# Altium PCB Terminal.PcbDoc
Units mm, origin at the board's own origin, x right, y up, seen from the top; angles counter-clockwise.
Board outline 96.25 x 94.75 mm, 2 copper layers (Top Layer, Bottom Layer); 57 components, 75 nets, 317 pads, 0 vias.
Unrouted connection lines stored in the file: 2.
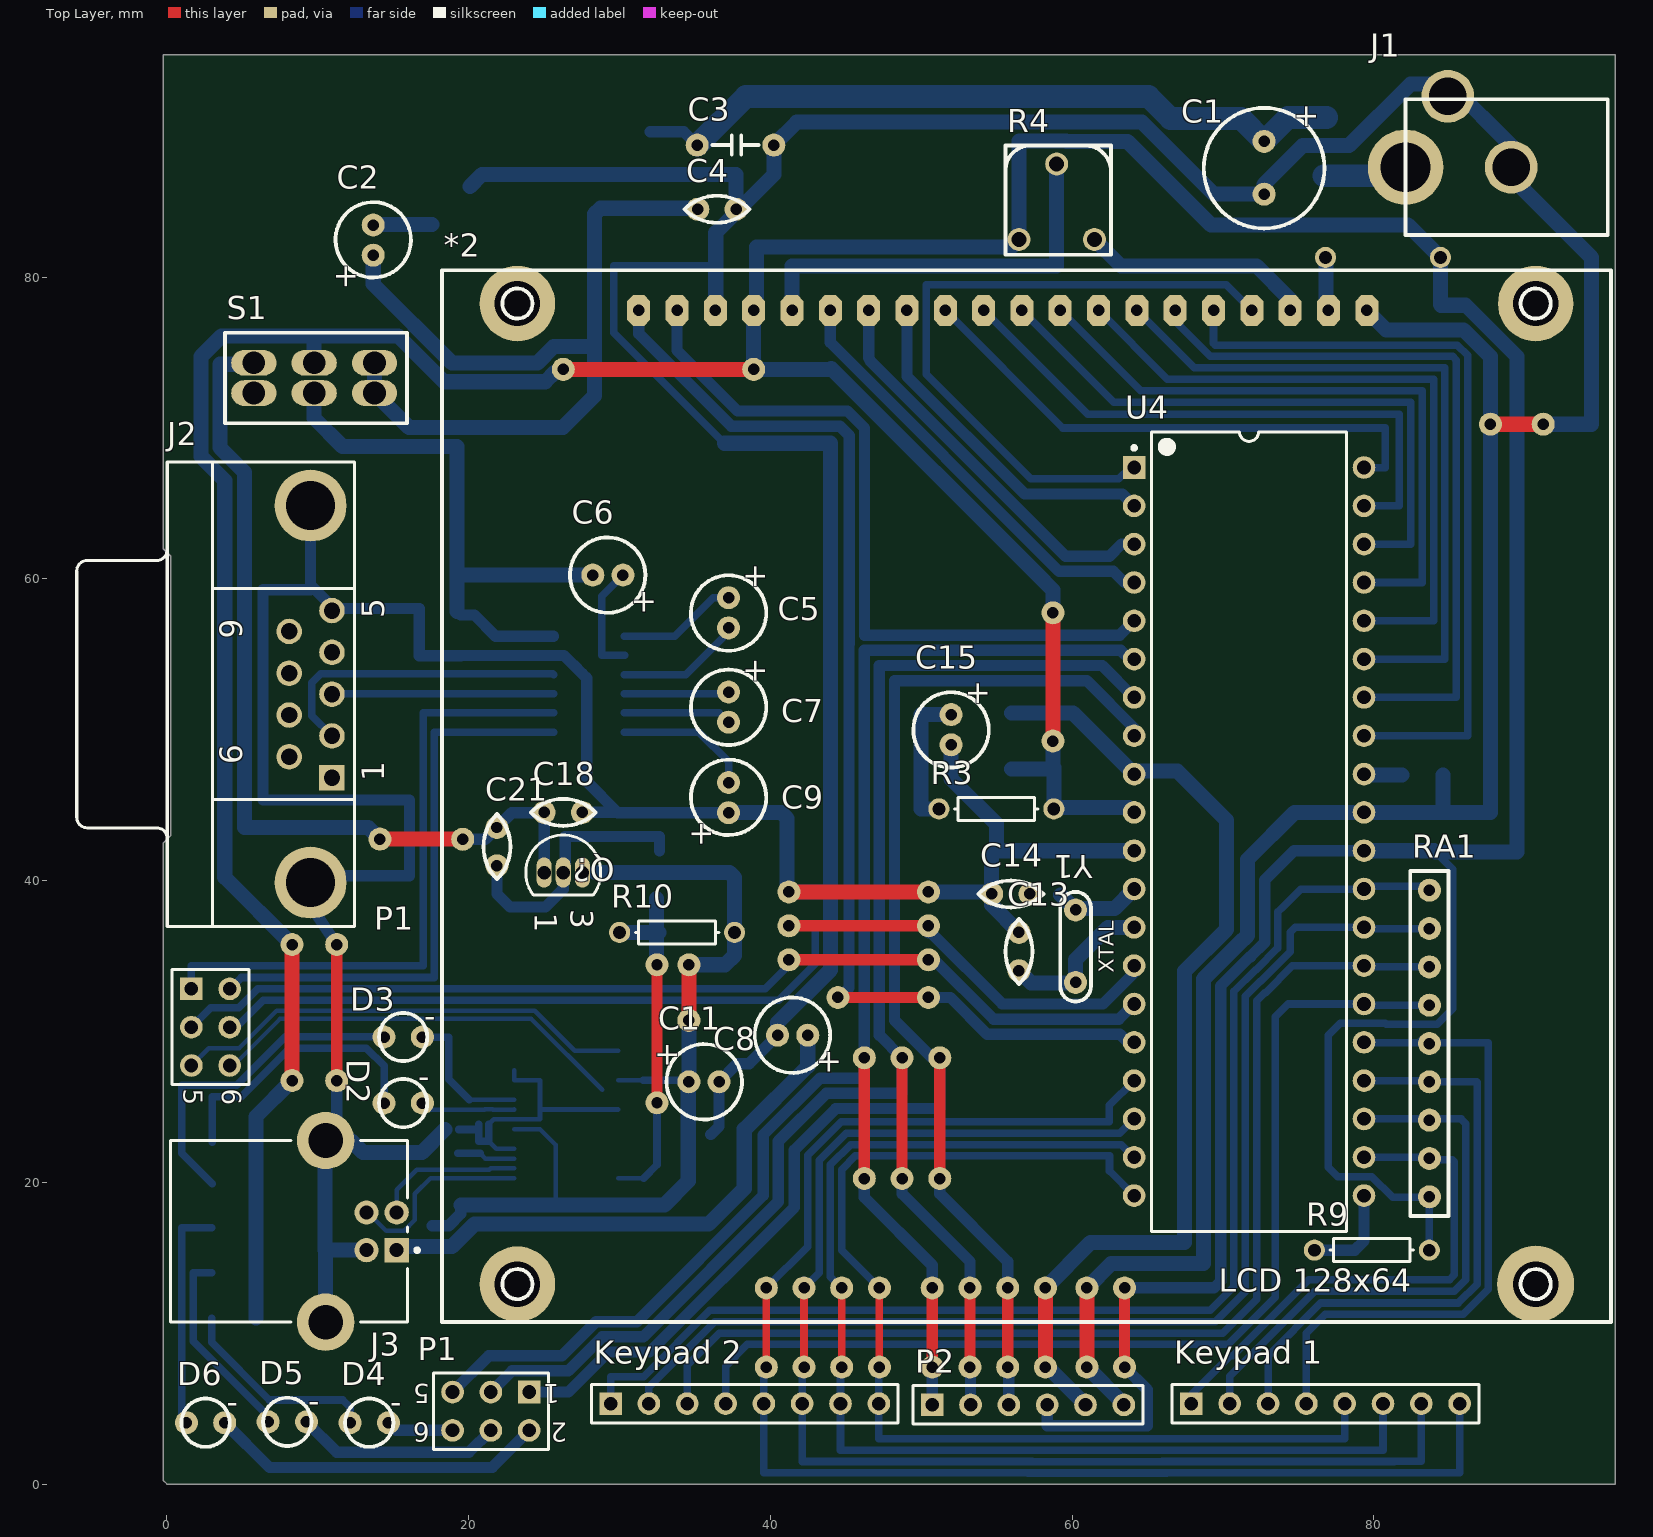
[diagram p0: Top Layer view]
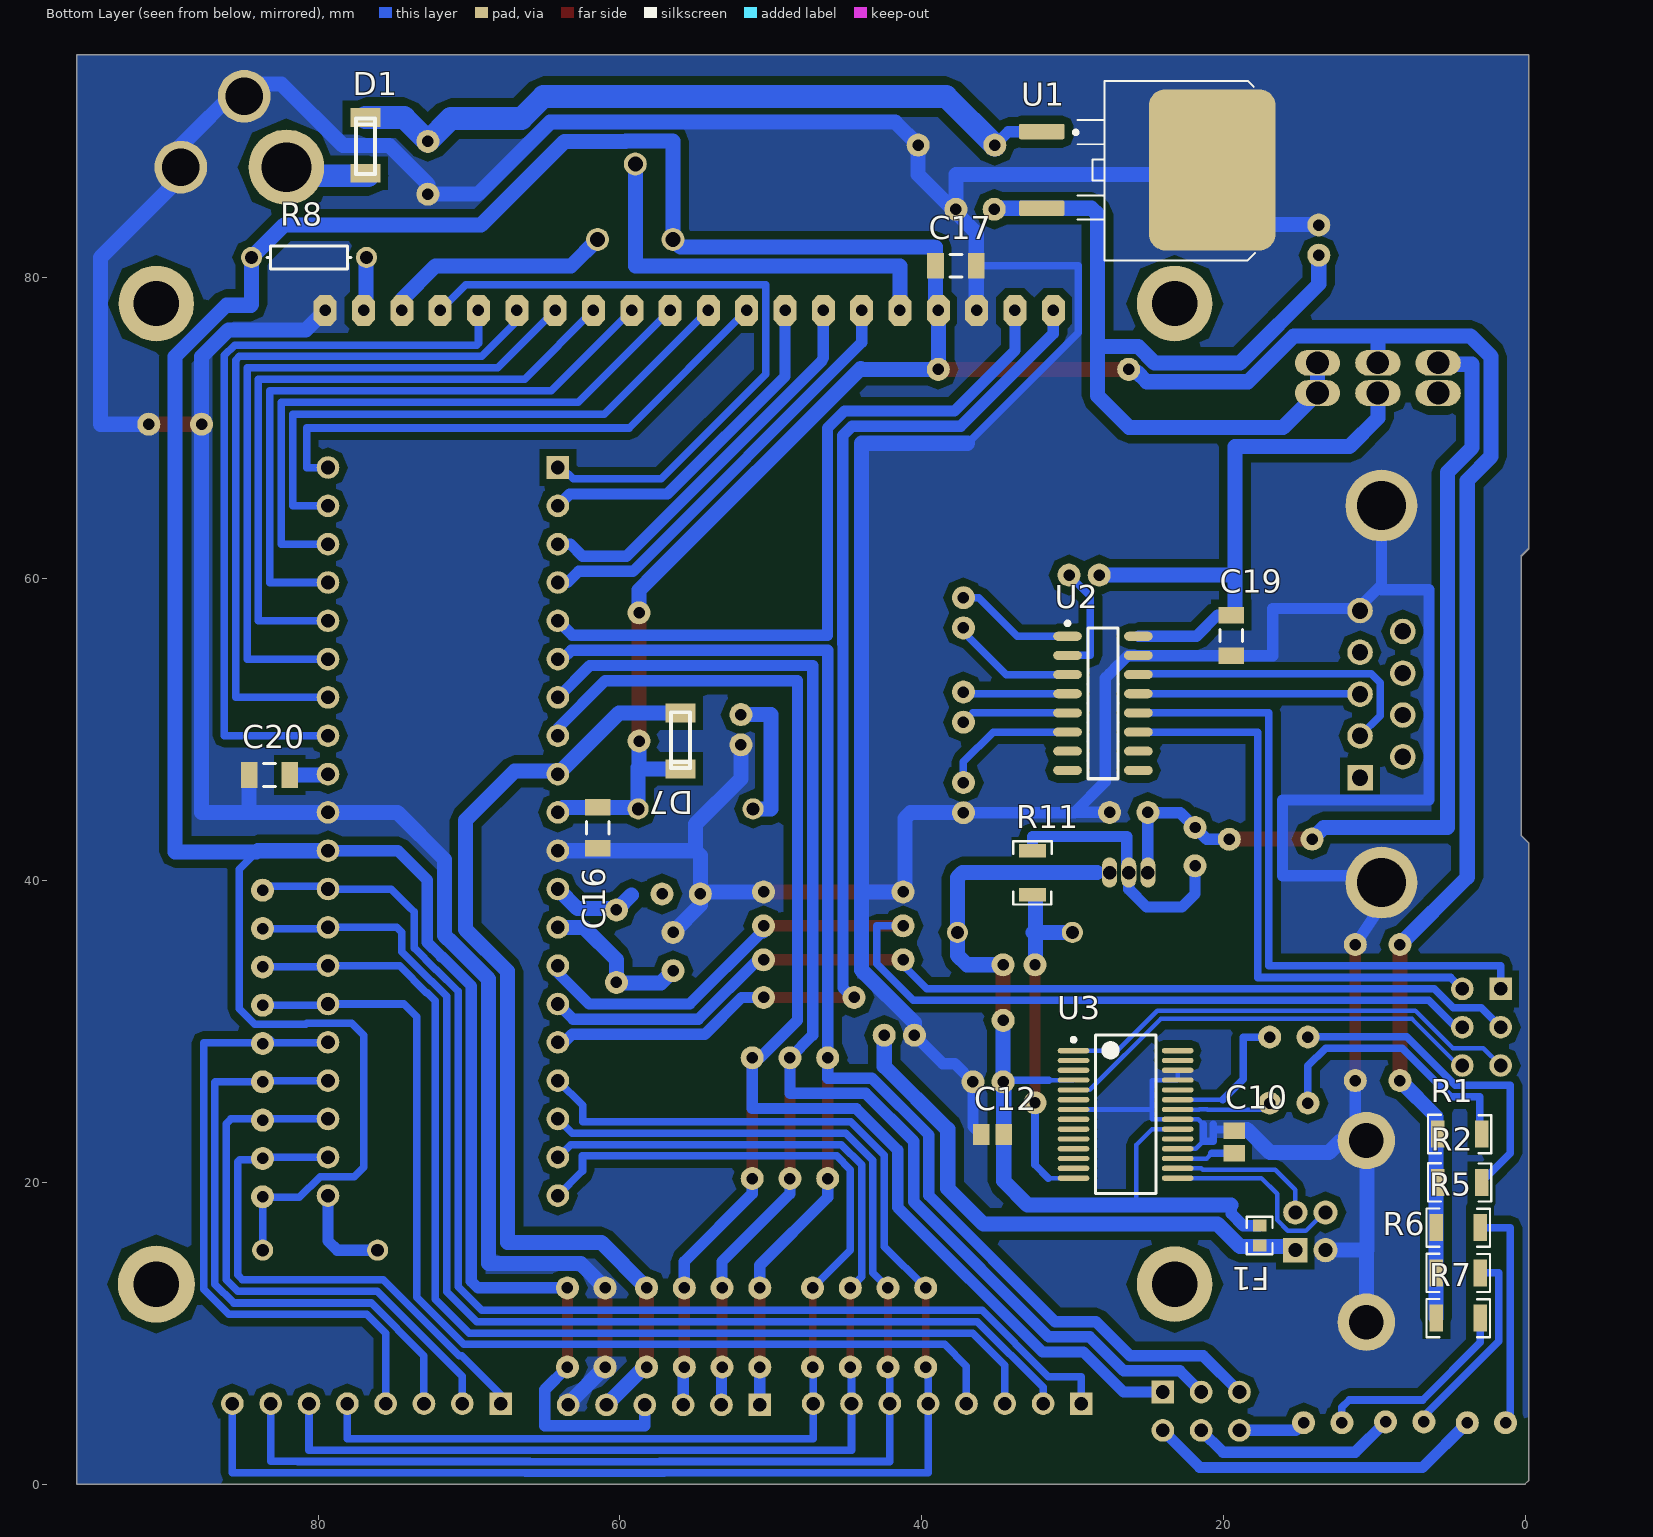
[diagram p1: Bottom Layer view, seen from below]

## Layer stack, top to bottom
Top Solder: solder mask 0.0102, Solder Resist, Dk 3.5
Top Layer: signal copper 0.0356
Dielectric 1: dielectric 0.32, FR-4, Dk 4.8
Bottom Layer: signal copper 0.0356
Bottom Solder: solder mask 0.0102, Solder Resist, Dk 3.5

## Board outline
0,0 -0.25,0.25 -0.25,42.5 0.25,43 0.25,43.25 0.25,61.5 -0.25,62 -0.25,94.75 96,94.75 96,0

## Design rules (kind name [scope] priority, off if disabled: settings)
Clearance Shield_Bottom [InPolygon] p1: gap=0.5
Clearance [All] p2: gap=0.254
PlaneClearance [All] p1: clearance=1
PlaneConnect [All] p1: planeconnectstyle=Relief reliefexpansion=0.508 reliefentries=4 reliefconductorwidth=0.254 reliefairgap=0.7
PolygonConnect Polygon [All vs IsNamedPolygon('Polygon_GND')] p1: connectstyle=Relief reliefconductorwidth=0.254 reliefentries=4 polygonreliefangle="90 Angle" airgapwidth=0
PolygonConnect PolygonConnect_2 [All vs IsNamedPolygon('Polygon_GND')] p2: connectstyle=Relief reliefconductorwidth=0.254 reliefentries=4 polygonreliefangle="90 Angle" airgapwidth=0.5
PolygonConnect PolygonConnect_1 [All] p3: connectstyle=Direct reliefconductorwidth=0.254 reliefentries=4 polygonreliefangle="90 Angle" airgapwidth=0.254
PolygonConnect [All] p4: connectstyle=Relief reliefconductorwidth=0.254 reliefentries=4 polygonreliefangle="45 Angle" airgapwidth=0
RoomDefinition term [InComponentClass('term')] p1: confinementstyle=ConfineIn formatcopy=TRUE lockcomponents=FALSE outline -0.25,94.75 -0.25,62 0.25,61.5 0.25,43 -0.25,42.5 -0.25,0.25 0,0 96,0 96,94.75
RoutingVias [All] p1: holewidth=0.711 width=1.27 viastyle="Through Hole" minholewidth=0.711 minwidth=1.27 maxholewidth=0.711 maxwidth=1.27
SolderMaskExpansion [All] p1: expansion=0.102
Width [All] p1: maxlimit=2 minlimit=0.254 preferedwidth=0.254 minimp=50.000000 maximp=50.000000 favimp=50.000000
28 further rules are at their usual default settings.

## Components (designator, comment, footprint, x,y, rotation, side; value= is the part's Value field where it differs from the comment)
*2 "LCD display" "LCD 128x64" 52.226,75.258 r0 top locked
C1 "CE 470uF 25V Fujicon" "Cap 8x12mm" 72.726,89.008 r270 top
C2 "CE 4.7uF 50V Fujicon" "Cap. el. 5x11mm" 13.671,81.464 r90 top
C3 "CML 330nF 50V P5" "Cap ceramic 4.2x3.8mm" 40.226,88.758 r180 top
C4 "CML 100nF 50V Y5V P2.5" "Cap. ceramic 4.2x3.8mm" 37.726,84.508 r180 top
C5 "CE 1.0uF 50V Fujicon" "Cap. el. 5x11mm" 37.226,58.758 r270 top
C6 "CE 1.0uF 50V Fujicon" "Cap. el. 5x11mm" 30.226,60.258 r180 top
C7 "CE 1.0uF 50V Fujicon" "Cap. el. 5x11mm" 37.226,52.508 r270 top
C8 "CE 1.0uF 50V Fujicon" "Cap. el. 5x11mm" 42.476,29.758 r180 top
C9 "CE 1.0uF 50V Fujicon" "Cap. el. 5x11mm" 37.226,44.508 r90 top
C10 "C0805 100nF 50V Y5V SAMSUNG" C0805 19.272,22.677 r90 bottom
C11 "CE 4.7uF 50V Fujicon" "Cap. el. 5x11mm" 34.594,26.668 r0 top
C12 "C0805 100nF 50V Y5V SAMSUNG" C0805 35.303,23.177 r0 bottom
C13 "CML 22pF 50V NP0" "Cap. ceramic 4.2x3.8mm" 56.476,36.574 r270 top
C14 "CML 22pF 50V NP0" "Cap. ceramic 4.2x3.8mm" 54.666,39.122 r0 top
C15 "CE 1.0uF 50V Fujicon" "Cap. el. 5x11mm" 51.976,51.008 r270 top
C16 "C1206 100nF 50V X7R SAMSUNG" C1206 61.476,43.508 r90 bottom
C17 "C1206 100nF 50V X7R SAMSUNG" C1206 37.726,80.758 r0 bottom
C18 "Cap" "Cap. ceramic 4.2x3.8mm" 24.998,44.528 r0 top
C19 "C1206 100nF 50V X7R SAMSUNG" C1206 19.476,56.258 r90 bottom
C20 "C1206 100nF 50V X7R SAMSUNG" C1206 83.226,47.008 r0 bottom
C21 "Cap" "Cap. ceramic 4.2x3.8mm" 21.872,40.987 r90 top
D1 "TMMBAT48" SOD-80 76.859,88.74 r90 bottom
D2 "L-934LYD" "LED 3mm" 14.388,25.258 r0 top
D3 "L-934LYD" "LED 3mm" 14.388,29.636 r0 top
D4 "HLMP-Q150-F0032" "LED 3mm" 12.137,4.071 r0 top
D5 "HLMP-Q150-F0032" "LED 3mm" 6.705,4.129 r0 top
D6 "HLMP-Q150-F0032" "LED 3mm" 1.288,4.071 r0 top
D7 "TMMBAT48" "SOD-80 A-K" 55.976,49.258 r270 bottom
F1 "Ferrite bead" RES0603R 17.587,16.481 r270 bottom
J1 "PWR2.5" "DC- Power connector" 82.103,87.297 r0 top
J2 "D Connector 9" DSUB1.385-2H9 0.018,52.367 r90 top
J3 "USB CU02SAH1000" 787780 14.226,16.758 r180 top
"Keypad 1" "Header 8" HDR1X8 67.905,5.338 r0 top
"Keypad 2" "Header 8" HDR1X8 29.405,5.338 r0 top
P1 "RS232 chip selector" HDR2X3 1.618,32.829 r270 top
P1 "Prog/Diode selector" HDR2X3 24.008,6.105 r180 top
P2 "Prog. Conn" HDR1X6 50.726,5.258 r0 top
Q? "PMOS-2" TO-92A 26.268,40.54 r270 top
R1 "RES SMD 1206 5% 200ppm 270R 1/4W" RES1206R 4.329,23.208 r0 bottom
R2 "RES SMD 1206 5% 200ppm 270R 1/4W" RES1206R 4.329,20.006 r0 bottom
R3 "RW125CF 10K" AXIAL-0.3 54.976,44.758 r180 top
R4 "PT6v(655MCL)10K" Trimmer 56.476,82.508 r0 top
R5 "R1206 1.8K 5% VISHAY" RES1206R 4.426,17.005 r0 bottom
R6 "R1206 1.8K 5% VISHAY" RES1206R 4.426,14.005 r0 bottom
R7 "R1206 1.8K 5% VISHAY" RES1206R 4.426,11.005 r0 bottom
R8 "R1206 27R 5% YAG/ASJ" AXIAL-0.3 80.605,81.314 r180 bottom
R9 "RW125CF 10K" AXIAL-0.3 79.866,15.508 r0 top
R10 "Res1" AXIAL-0.3 33.811,36.574 r180 top
R11 "Res1" RES1206R 32.645,40.524 r90 bottom
RA1 "RA8A9 10K" RA8A9 94.476,16.508 r90 top
S1 "SW-DPDT" "SWITCH-DPDT - dpl" 5.758,72.325 r0 top
U1 "7805 SMD" D2PAK-3 26.383,87.115 r0 bottom
U2 "MAX232CWE" NSO16_L 27.976,51.758 r180 bottom
U3 "FT232RL-Reel" SSOP-28_N 26.476,24.508 r180 bottom
U4 "ATmega16-16PU" 40P6 71.726,43.258 r0 top
Y1 "Q11.0592 MHz HC-49S" XTAL 60.226,33.258 r90 top

## Footprints (in the part's own frame and the unit in brackets; to place one, negate y for a bottom-side part, rotate by r counter-clockwise, add the part's x,y. Pads: shape width x height; smd on the part's side, far side on the other; paste and mask are expansions set on the pad)
40P6 [mm] "DIP, 40-Leads, Row Spacing 15.24mm, Pitch 2.54mm, Body 52.2x13.95mm"
  rect 1.5x1.5 hole 0.9: 1(-7.62,24.13)
  round 1.5 hole 0.9: 2(-7.62,21.59) 3(-7.62,19.05) 4(-7.62,16.51) 5(-7.62,13.97) 6(-7.62,11.43) 7(-7.62,8.89) 8(-7.62,6.35) 9(-7.62,3.81) 10(-7.62,1.27) 11(-7.62,-1.27) 12(-7.62,-3.81) 13(-7.62,-6.35) 14(-7.62,-8.89) 15(-7.62,-11.43) 16(-7.62,-13.97) 17(-7.62,-16.51) 18(-7.62,-19.05) 19(-7.62,-21.59) 20(-7.62,-24.13) 21(7.62,-24.13) 22(7.62,-21.59) 23(7.62,-19.05) 24(7.62,-16.51) 25(7.62,-13.97) 26(7.62,-11.43) 27(7.62,-8.89) 28(7.62,-6.35) 29(7.62,-3.81) 30(7.62,-1.27) 31(7.62,1.27) 32(7.62,3.81) 33(7.62,6.35) 34(7.62,8.89) 35(7.62,11.43) 36(7.62,13.97) 37(7.62,16.51) 38(7.62,19.05) 39(7.62,21.59) 40(7.62,24.13)
  silkscreen extent -7.74,-26.5 6.45,26.5, body extent -7.05,-26.47 7.05,26.47, height 4.83
787780 [mm] "Connector; USB1.1, Type B, Thru-Hole; 4 Position; Right Angle"
  rect 1.6x1.6 hole 0.92: 1(-1,1.25)
  round 1.6 hole 0.92: 2(-1,-1.25) 3(1,-1.25) 4(1,1.25)
  round 3.8 hole 2.3: 5(3.71,6.02) 6(3.71,-6.02)
  silkscreen extent -2.48,-6.02 13.99,6.02
AXIAL-0.3 [mm] "Axial Device, Thru-Hole; 2 Leads; 0.3 in Pin Spacing"
  round 1.4 hole 0.85: 1(-3.81,0) 2(3.81,0)
  silkscreen extent -2.77,-0.76 2.77,0.76
C0805 [mm] "Chip Capacitor, Body 2.0x1.3mm, IPC High Density"
  rect 1.1x1.4 smd: 1(-0.75,0) 2(0.75,0)
  body extent -1.1,-0.72 1.1,0.72, height 1.4
C1206 [mm] "Chip Capacitor, Body 3.2x1.6mm, IPC High Density"
  rect 1.1x1.7 smd: 1(-1.35,0) 2(1.35,0)
  silkscreen extent -0.4,-0.75 0.4,0.75, body extent -1.7,-0.9 1.7,0.9, height 1.3
"Cap 8x12mm" [mil] "electrolyt.cap. RA, 20%, -40~85°C, 8x12mm RM3.5"
  round 60 hole 30: 1(0,0) 2(137.8,0)
  silkscreen extent -87,-157 227,157
"Cap ceramic 4.2x3.8mm" [mil] "330nF 50V Y5V +80-20% P5"
  round 60 hole 30: 1(0,0) 2(200,0)
  silkscreen extent 40,-25 160,25
"Cap. ceramic 4.2x3.8mm" [mil] "4.2x3.8mm P=2.54mm"
  round 60 hole 30: 1(0,0) 2(100,0)
  silkscreen extent -35,-35 135,35
"Cap. el. 5x11mm" [mil] "electrolyt.cap. RA, 20%, -40~85°C, 5x11mm RM2"
  round 60 hole 30: 1(0,0) 2(78.74,0)
  silkscreen extent -58,-98 138,98
D2PAK-3 [mil] "D-PAK/TO-263-3; 3 Leads (1 Cropped); Body 14.7 (inc. leads) x 10.2 mm (LxW max)"
  round 20 on Mech15: 0(0,0)
  rrect25% 120x40 smd: 1(222.5,-100) 3(222.5,100)
  rrect25% 330x420 smd: 4(-222.5,0)
  silkscreen extent -335,-232 139,236, body extent -361,-197 256,197, height 189
"DC- Power connector" [mm] "YDJ-1140"
  round 5 hole 3.3: 1(0,0)
  round 3.5 hole 2.5: 2(7,0) 3(2.8,4.7)
  silkscreen extent 0,-4.5 13.4,4.5
DSUB1.385-2H9 [mm] "Connector; D Subminiature; 9 Position; Right Angle; Pitch 1.385 mm"
  rect 1.69x1.69 hole 1.09: 1(-5.54,-10.92)
  round 1.69 hole 1.09: 2(-2.77,-10.92) 3(0,-10.92) 4(2.77,-10.92) 5(5.54,-10.92) 6(-4.155,-8.08) 7(-1.385,-8.08) 8(1.385,-8.08) 9(4.155,-8.08)
  round 4.76 hole 3.26: 10(-12.495,-9.5) 11(12.495,-9.5)
  silkscreen extent -15.4,-12.4 15.4,6
HDR1X6 [mm] "Connector; Header; 6 Position"
  rect 1.5x1.5 hole 0.9: 1(0,0)
  round 1.5 hole 0.9: 2(2.54,0) 3(5.08,0) 4(7.62,0) 5(10.16,0) 6(12.7,0)
  silkscreen extent -1.27,-1.27 13.97,1.27
HDR1X8 [mm] "Connector; Header; 8 Position"
  rect 1.5x1.5 hole 0.9: 1(0,0)
  round 1.5 hole 0.9: 2(2.54,0) 3(5.08,0) 4(7.62,0) 5(10.16,0) 6(12.7,0) 7(15.24,0) 8(17.78,0)
  silkscreen extent -1.27,-1.27 19.05,1.27
HDR2X3 [mm] "Connector; Header; 3x2 Position"
  rect 1.5x1.5 hole 0.9: 1(0,0)
  round 1.5 hole 0.9: 2(0,2.54) 3(2.54,0) 4(2.54,2.54) 5(5.08,0) 6(5.08,2.54)
  silkscreen extent -1.27,-1.27 6.35,3.81
"LCD 128x64" [mil]
  oct 60x80 hole 30: 1(-825,100) 2(-725,100) 3(-625,100) 4(-525,100) 5(-425,100) 6(-325,100) 7(-225,100) 8(-125,100) 9(-25,100) 10(75,100) 11(175,100) 12(275,100) 13(375,100) 14(475,100) 15(575,100) 16(675,100) 17(775,100) 18(875,100) 19(975,100) 20(1075,100)
  silkscreen extent -1339,-2540 1713,205
"LED 3mm" [mil] "3mm, 0.7-2mcd@2mA, 588nm Yellow, Diffused, 60°"
  round 60 hole 30: 1(0,0) 2(100,0)
  silkscreen extent -13,-63 113,63
NSO16_L [mm] "SOIC, 16-Leads, Body 9.9x3.9mm, Pitch 1.27mm, IPC High Density"
  oval 1.9x0.6 smd: 1(-2.35,4.445) 2(-2.35,3.175) 3(-2.35,1.905) 4(-2.35,0.635) 5(-2.35,-0.635) 6(-2.35,-1.905) 7(-2.35,-3.175) 8(-2.35,-4.445) 9(2.35,-4.445) 10(2.35,-3.175) 11(2.35,-1.905) 12(2.35,-0.635) 13(2.35,0.635) 14(2.35,1.905) 15(2.35,3.175) 16(2.35,4.445)
  silkscreen extent -2.48,-5 1,5.42, body extent -2,-5 2,5, height 1.75
RA8A9 [mil]
  round 60 hole 30: 1(100,425) 2(200,425) 3(300,425) 4(400,425) 5(500,425) 6(600,425) 7(700,425) 8(800,425) 9(900,425)
  silkscreen extent 50,375 950,475
RES0603R [mm] "resistor 0603 reflow soldering"
  rect 0.8x0.9 smd: 1(-0.65,0) 2(0.65,0)
  silkscreen extent -1.25,-0.85 1.25,0.85, body extent -0.8,-0.4 0.8,0.4, height 0.45
RES1206R [mm] "resistor 1206 reflow soldering"
  rect 0.9x1.8 smd: 1(-1.45,0) 2(1.45,0)
  silkscreen extent -2.1,-1.27 2.1,1.27, body extent -1.5,-0.78 1.6,0.78, height 0.55
SOD-80 [mm]
  rect 1.25x2 smd: 1(-1.85,0) 2(1.85,0)
  silkscreen extent -1.91,-0.64 1.78,0.64
"SOD-80 A-K" [mm]
  rect 1.25x2 smd: A(-1.85,0) K(1.85,0)
  silkscreen extent -1.91,-0.64 1.78,0.64
SSOP-28_N [mm] "SOP, 28-Leads, Body 10.2x5.3mm, Pitch 0.65mm, IPC Medium Density"
  oval 2.1x0.35 smd: 1(-3.45,4.225) 2(-3.45,3.575) 3(-3.45,2.925) 4(-3.45,2.275) 5(-3.45,1.625) 6(-3.45,0.975) 7(-3.45,0.325) 8(-3.45,-0.325) 9(-3.45,-0.975) 10(-3.45,-1.625) 11(-3.45,-2.275) 12(-3.45,-2.925) 13(-3.45,-3.575) 14(-3.45,-4.225) 15(3.45,-4.225) 16(3.45,-3.575) 17(3.45,-2.925) 18(3.45,-2.275) 19(3.45,-1.625) 20(3.45,-0.975) 21(3.45,-0.325) 22(3.45,0.325) 23(3.45,0.975) 24(3.45,1.625) 25(3.45,2.275) 26(3.45,2.925) 27(3.45,3.575) 28(3.45,4.225)
  silkscreen extent -3.57,-5.25 2,5.25, body extent -2.8,-5.25 2.8,5.25, height 2
"SWITCH-DPDT - dpl" [mm] "KELCO"
  oval 3x1.7 hole 1.5: 1(0,0) 2(4,0) 3(8,0) 4(8,2) 5(4,2) 6(0,2)
  silkscreen extent -1.91,-2 10.16,4
TO-92A [mm] "TO, Flat Index; 3 In-Line, Axial Leads; Body Dia. 4.5mm; Leads 0.51 x 0.48 mm (max)"
  oval 2x1 hole 0.9: 1(0,-1.27) 2(0,0) 3(0,1.27)
  silkscreen extent -2.48,-2.48 1.5,2.48
Trimmer [mm] "Carbon Trimmer Potent. 5x5mm 10K, Vertical Type"
  round 1.524 hole 1: 1(0,0) 2(5,0) 3(2.5,5)
  silkscreen extent -0.89,-1.02 6.1,6.22
XTAL [mil]
  round 60 hole 30: 1(0,0) 2(188.98,0)
  silkscreen extent -50,-40 236,40

## Part data
C1: library part "Cap Pol1"
C2 C5 C6 C7 C8 C9 C11: library part "Cap Pol1", "Polarized Capacitor (Radial)"
C3 C4 C13 C14 C16 C17 C19 C20: library part Cap, "Capacitor"
C10 C12: library part "Cap Semi", "Capacitor (Semiconductor SIM Model)"
C15: library part CAPT_1u_0805_10V, "Capacitor SMD Tantalum 1uF 20% 10V 0805"
C18 C21: "Capacitor"
D1: library part "Diode 1N5407", "3 Amp Medium Power Silicon Rectifier Diode"
D2 D3: library part HLMA-PF00-N0031, "Subminiature High Performance AlInGaP Red LED Lamp"
D4 D5 D6: "Subminiature Red LED Lamp"
D7: library part DIODE_1N4148_200mA_SOD523F, "Diode SMD small signal 0.2A SOD-523F"
F1: library part Res2, "Resistor"
J1: "Low Voltage Power Supply Connector"
J2: "Receptacle Assembly, 9 Position, Right Angle"
J3: library part 787834-2, "USB 1.1, Vertical, Thru-Hole, B Type, Receptacle, 4 Position, Natural"
"Keypad 1" "Keypad 2": "Header, 8-Pin"
P1 P1: library part "Header 3X2", "Header, 3-Pin, Dual row"
P2: library part "Header 6", "Header, 6-Pin"
Q?: "P-Channel Power MOSFET"
R1 R2 R3 R5 R6 R7 R8 R9: library part Res1, "Resistor"
R4: library part "Res Tap", "Tapped Resistor"
R10 R11: "Resistor"
RA1: library part Component_1
S1: "Double-Pole, Double-Throw Switch"
U1: library part LM2931AD2T-5.0, "Low Dropout Voltage Regulator"
U2: "+5V Powered RS-232 Driver/Receiver"
U3: "USB UART Asynchronous Serial Data Transfer Chip, SSOP-28, Tape and Reel"
U4: "8-bit AVR Microcontroller, 4.5-5.5V, 16KB Flash, 512 Bytes EEPROM, 1KB SRAM, 40-pin PDIP, Industrial Grade (-40°C to 85°C)"
Y1: library part XTAL, "Crystal Oscillator"

## Free pads (board coordinates)
  round 1.524 hole 0.762: 2(44.726,7.758) 3(47.226,7.758) 4(42.226,7.758) 5(39.726,7.758) 6(47.226,13.008) 7(44.726,13.008) 8(42.226,13.008) 9(39.726,13.008) 13(50.726,13.008) 14(53.226,13.008) 15(55.726,13.008) 16(58.226,13.008) 17(60.976,13.008) 18(63.476,13.008) 19(50.726,7.758) 20(53.226,7.758) 21(55.726,7.758) 22(58.226,7.758) 23(60.976,7.758) 24(63.476,7.758) 25(46.226,20.258) 26(48.726,20.258) 27(51.226,20.258) 28(46.226,28.258) 29(48.725,28.258) 30(51.226,28.258) 31(87.726,70.258) 32(91.226,70.258) 33(38.891,73.895) 34(26.268,73.895) 35(58.726,49.258) 36(58.726,57.758) 37(44.476,32.258) 38(50.476,32.258) 39(50.476,37.008) 40(50.476,34.758) 41(41.226,34.758) 42(41.226,37.008) 50(41.226,39.258) 51(50.476,39.258) 56(11.25,26.748) 57(11.253,35.769) 60(8.289,26.75) 61(8.289,35.769) 62(34.594,30.742) 63(34.597,34.427) 64(32.482,25.277) 65(32.482,34.427) 66(14.115,42.756) 67(19.604,42.747)
  round 5 hole 3: 52(23.226,78.258) 53(90.726,78.258) 55(23.226,13.258)
  round 5.1 hole 3: 54(90.726,13.258)

## Nets (pads, with @x,y where several pads share a name; then routed paths per layer and width w, separated by ;. In a path a pad name is that pad's centre, name@x,y a point inside that pad or via, vN(x,y) a via of type N, cw(c..) or ccw(c..) an arc to the next point about the centre after c; other vN are vias at no path point)
ADAPT-VCC-IN: C2.1 C4.2 S1.3 S1.4 U1.3 | length 56.7
  Bottom Layer w1: C2.1 13.671,79.542 18.887,74.325 24.554,74.325 25.64,75.411 28.302,75.411 28.349,75.458 ; S1.4 S1.3 16.047,70.036 26.239,70.036 28.349,72.145 28.349,75.458 ; C4.2 35.119,84.575 U1.3 28.735,84.575 28.349,84.189 28.349,75.458
CS1: *2.1 pad.37 pad.38 U4.16 | length 76.8
  Top Layer w0.75: pad.37 pad.38
  Bottom Layer w0.75: *2.1@31.271,77.713 *2.1 31.271,76.264 37.41,70.125 44.609,70.125 45.226,69.508 45.226,55.694 45.214,55.682 45.214,32.893 44.68,32.359 pad.37 ; pad.38 51.926,32.258 54.365,29.819 63.165,29.819 63.696,29.288 U4.16
CS2: *2.2 U4.5 | length 49.2
  Bottom Layer w0.75: *2.2 33.811,75.144 37.826,71.129 45.105,71.129 46.23,70.004 46.23,56.27 63.148,56.27 U4.5
FTDI-RXD: P1.6@4.158,27.749 U3.5 | length 27.9
  Bottom Layer w0.3: P1.6@4.158,27.749 4.329,27.919 4.575,27.919 7.492,30.836 24.148,30.836 28.851,26.133
FTDI-TXD: P1.5@1.618,27.749 U3.1 | length 30.9
  Bottom Layer w0.3: P1.5@1.618,27.749 2.772,28.903 4.775,28.903 7.263,31.39 24.377,31.39 27.035,28.733 U3.1
GND: *2.3 *2.20 C1.2 C2.2 C3.1 C4.1 C8.2 C9.1 C10.2 C11.2 C12.2 C13.1 C14.1 C15.2 C16.1 C17.1 C18.2 C19.1 C20.2 J1.2 J1.3 J2.5 J2.10 J2.11 J3.4 J3.5 J3.6 P2.6 pad.17 pad.23 pad.31 pad.32 pad.50 pad.51 pad.56 pad.57 U1.4 U2.15 U3.7 U3.18 U3.21 U3.25 U3.26 U4.11 U4.31 | length 500.3
  Top Layer w0.75: pad.56 pad.57
  Top Layer w1: pad.50 pad.51 ; pad.23 pad.17 ; pad.31 pad.32
  Bottom Layer w0.3: C10.2 C10.2@19.354,23.508 ; 21.33,22.733 21.83,22.233 U3.18 ; 21.33,23.86 21.653,24.183 U3.21 24.726,24.183 24.726,24.833 ; U3.26 U3.25 23.051,26.758 24.726,26.758 24.726,24.833 ; U3.7 24.726,24.833
  Bottom Layer w0.5: C10.2@19.354,23.508 20.655,23.508 ; 20.655,23.858 20.655,23.508 ; 21.33,23.86 21.33,22.733 20.655,22.733 20.655,23.508 ; C17.1 29.603,80.758 29.603,76.336 36.942,68.996
  Bottom Layer w0.75: J2.11 9.518,59.609 ; pad.56 J3.6@11.253,23.515 ; pad.57 8.502,39.872 J2.10 10.495,39.872 10.954,40.331 16.076,40.331 16.076,45.353 6.367,45.353 6.367,59.292 9.518,59.292 9.518,59.609 ; C19.1 16.726,54.908 16.726,58.048 11.079,58.048 9.518,59.609 ; C19.1@19.501,54.933 26.32,54.933 26.954,54.299 26.96,54.293 27.54,53.713 27.833,53.42 27.833,46.564 29.868,44.528 ; C18.2 29.868,44.528 ; C12.2 36.594,23.718 C11.2 37.795,27.869 38.587,27.869 C8.2 ; *2.3 *2.3@36.376,77.823 ; C9.1 29.888,44.508 29.868,44.528
  Bottom Layer w1: J3.6@10.226,22.488 10.476,22.238 10.476,15.508 J3.4 ; J3.5 10.516,15.468 ; J3.6 12.199,22.778 12.991,21.986 16.896,21.986 18.418,23.508 ; C2.2@13.671,83.508 U1.4@17.575,83.508 ; U1.4@20.091,86.024 20.868,86.802 37.726,86.802 C4.1 ; *2.3@36.376,77.823 C17.1 36.376,82.948 40.226,86.798 C3.1 41.746,90.278 64.639,90.278 69.409,85.508 C1.2 72.726,86.162 75.289,88.725 78.35,88.725 82.425,92.799 85.024,92.799 89.224,88.599 89.224,86.51 94.42,81.314 94.42,70.258 pad.32 ; 36.942,68.996 43.976,68.996 43.976,39.258 ; C9.1 40.726,44.508 41.101,44.134 41.101,39.475 pad.50 43.976,39.258 ; C8.2 40.476,30.588 43.976,34.088 43.976,39.258 ; pad.51 54.53,39.258 C14.1 ; C15.2 51.976,46.758 54.976,43.758 54.976,41.988 ; C13.1 54.666,38.384 C14.1 ; pad.23 63.426,5.308 P2.6 ; pad.17 62.592,14.624 68.715,14.624 68.715,33.487 71.326,36.098 71.361,36.098 71.635,36.372 71.635,41.417 74.746,44.528 U4.31 84.576,44.528 ; U4.11 54.976,41.988 ; *2.20 80.821,76.508 85.953,76.508 87.726,74.735 pad.31 87.726,44.508 84.576,44.508 C20.2 ; C14.1 54.666,41.678 54.976,41.988
LCD-VDD: *2.4 C16.2 C17.2 D7.K P2.4 pad.18 pad.24 pad.33 pad.34 pad.35 pad.36 pad.60 pad.61 R1.2 R2.2 R3.1 R4.1 R5.2 R6.2 R7.2 R8.1 R9.2 RA1.1 S1.5 U4.10 U4.30 | length 371.5
  Top Layer w0.75: pad.24 pad.18
  Top Layer w1: pad.60 pad.61 ; pad.34 pad.33 ; pad.35 pad.36
  Bottom Layer w0.5: R9.2 83.681,15.514 RA1.1@83.681,19.008 ; RA1.1 RA1.1@83.681,19.008 ; 83.996,41.988 84.076,41.908 85.226,40.758 85.226,31.503 84.205,30.482 80.82,30.482 80.76,30.542 77.76,30.542 76.98,29.762 76.98,21.008 77.606,20.382 79.866,20.382 81.24,19.008 RA1.1@83.681,19.008
  Bottom Layer w0.75: P2.4 58.346,3.879 64.976,3.879 64.976,6.258 pad.24 ; pad.18 69.409,13.008 69.844,13.444 69.844,33.019 71.794,34.969 71.829,34.969 72.764,35.904 72.764,40.046 74.706,41.988 U4.30
  Bottom Layer w1: R7.2@5.89,11.019 5.89,19.916 5.89,22.677 5.89,24.351 pad.60 ; pad.61 3.828,40.23 3.828,66.534 2.25,68.113 2.25,74.752 3.608,76.111 15.329,76.111 18.368,73.071 25.073,73.071 25.728,73.726 26.268,73.726 pad.34 ; S1.5 9.758,75.59 ; D7.K 58.576,47.408 58.726,47.558 ; pad.35 58.726,47.558 ; pad.36 58.726,59.258 57.664,60.321 44.03,73.954 43.971,73.895 pad.33 *2.4 39.076,77.983 C17.2 39.076,82.004 51.408,82.004 51.416,82.012 52.454,82.012 52.462,82.004 55.972,82.004 R4.1 56.476,89.008 56.492,89.024 59.604,89.024 59.62,89.008 63.666,89.008 69.21,83.464 82.266,83.464 R8.1 84.415,78.196 84.464,78.147 86.087,78.147 89.476,74.758 89.476,41.908 84.076,41.908 ; U4.10 63.776,44.858 C16.2 58.886,44.858 R3.1 58.786,47.498 58.726,47.558 ; U4.30 83.996,41.988
LCD-VEE: *2.18 R4.2 | length 15.4
  Bottom Layer w1: R4.2 63.226,80.758 72.226,80.758 74.451,78.533 *2.18
LCD-VO: *2.5 R4.3 | length 27.3
  Bottom Layer w1: *2.5 41.431,80.75 58.968,80.75 58.976,80.758 R4.3
LED1: D6.2 P1.2@24.008,3.565 | length 22.4
  Bottom Layer w0.75: D6.2 6.791,1.109 21.551,1.109 P1.2@24.008,3.565
LED2: D5.2 P1.4@21.468,3.565 | length 13.7
  Bottom Layer w0.75: D5.2 11.253,2.121 20.024,2.121 P1.4@21.468,3.565
LED3: D4.2 P1.6@18.928,3.565 | length 4.5
  Bottom Layer w0.75: D4.2 15.183,3.565 P1.6@18.928,3.565
MAX232-VCC: C6.2 C19.2 S1.2 U2.16 | length 38.6
  Bottom Layer w0.75: C19.2 20.376,57.608 21.781,56.203 U2.16
  Bottom Layer w1: S1.2 9.758,70.657 11.633,68.782 19.226,68.782 19.226,60.258 ; C19.2@19.226,57.858 19.226,60.258 ; C6.2 19.226,60.258
MAX-RXD: P1.2@4.158,32.829 U2.11 | length 38.1
  Bottom Layer w0.5: P1.2@4.158,32.829 4.912,33.583 17.73,33.583 17.73,35.754 17.73,49.853 U2.11
MAX-TXD: P1.1@1.618,32.829 U2.12 | length 42.3
  Bottom Layer w0.5: P1.1@1.618,32.829 1.618,34.368 16.976,34.368 16.976,51.123 U2.12
MCU-RXD: P1.4@4.158,30.289 pad.39 pad.42 U4.14 | length 71.2
  Top Layer w0.75: pad.42 pad.39
  Bottom Layer w0.5: P1.4@4.329,30.459 4.754,30.459 6.367,32.072 40.54,32.072 42.972,34.504 42.972,37.008 pad.42
  Bottom Layer w0.75: pad.39 50.476,36.548 50.653,36.548 55.374,31.827 62.045,31.827 64.106,33.888 U4.14
MCU-TXD: P1.3@1.618,30.289 pad.40 pad.41 U4.15 | length 66.7
  Top Layer w0.75: pad.41 pad.40
  Bottom Layer w0.5: P1.3@1.618,30.289 2.904,31.575 4.769,31.575 6.023,32.829 25.783,32.829 39.65,32.829 41.325,34.504 41.226,34.504 pad.41
  Bottom Layer w0.75: pad.40 50.846,34.758 54.781,30.823 63.101,30.823 U4.15
MISO: P1.3@21.468,6.105 P2.2 pad.14 pad.20 pad.26 pad.29 U4.7 | length 109.4
  Top Layer w0.75: pad.29 pad.26 ; pad.20 pad.14
  Bottom Layer w0.75: P1.3@21.468,6.105 22.874,7.511 26.599,7.511 28.849,9.761 31.569,9.761 40.523,18.715 40.523,22.725 43.701,25.903 48.726,25.903 pad.29 47.222,29.761 47.222,54.262 61.972,54.262 61.976,54.258 61.996,54.258 U4.7 ; pad.26 48.726,19.258 53.226,14.758 pad.14 ; pad.20 53.266,7.718 P2.2
MOSI: P1.5@18.928,6.105 P2.1 pad.13 pad.19 pad.25 pad.28 U4.6 | length 109.6
  Top Layer w0.75: pad.25 pad.28 ; pad.19 pad.13
  Bottom Layer w0.75: P1.5@18.928,6.105 21.338,8.515 26.183,8.515 28.433,10.765 31.153,10.765 39.519,19.131 39.519,23.141 43.285,26.907 46.226,26.907 pad.28 46.218,28.266 46.218,55.266 63.218,55.266 63.796,54.688 U4.6 ; pad.25 46.226,19.008 50.726,14.508 pad.13 ; P2.1 pad.19
Net*2_6: *2.6 U4.4 | length 28.8
  Bottom Layer w0.75: *2.6 43.971,75.673 59.14,60.504 62.73,60.504 63.466,59.768 U4.4
Net*2_7: *2.7 U4.3 | length 26.6
  Bottom Layer w0.75: *2.7 46.511,74.643 46.601,74.553 46.601,74.464 59.556,61.508 62.476,61.508 63.276,62.308 U4.3
Net*2_8: *2.8 U4.2 | length 23
  Bottom Layer w0.75: *2.8 49.051,73.433 56.855,65.629 63.325,65.629 U4.2
Net*2_9: *2.9 U4.40 | length 36.4
  Bottom Layer w0.5: *2.9 59.381,70.008 80.76,70.008 80.76,67.388 U4.40
Net*2_10: *2.10 U4.39 | length 38.8
  Bottom Layer w0.5: *2.10 61.021,70.909 81.694,70.909 81.694,64.848 U4.39
Net*2_11: *2.11 U4.38 | length 40.8
  Bottom Layer w0.5: *2.11 62.748,71.721 82.448,71.721 82.448,62.308 U4.38
Net*2_12: *2.12 U4.37 | length 42.8
  Bottom Layer w0.5: *2.12 64.534,72.475 83.202,72.475 83.202,59.768 U4.37
Net*2_13: *2.13 U4.36 | length 44.7
  Bottom Layer w0.5: *2.13 66.307,73.242 83.956,73.242 83.956,57.228 U4.36
Net*2_14: *2.14 U4.35 | length 46.7
  Bottom Layer w0.5: *2.14 68.093,73.996 84.71,73.996 84.71,54.688 U4.35
Net*2_15: *2.15 U4.34 | length 48.9
  Bottom Layer w0.5: *2.15 66.831,77.087 69.168,74.75 85.224,74.75 85.464,74.511 85.464,52.148 U4.34
Net*2_16: *2.16 U4.33 | length 51.4
  Bottom Layer w0.5: *2.16 69.371,75.613 69.48,75.504 85.537,75.504 86.218,74.823 86.218,49.608 U4.33
Net*2_17: *2.17 U4.1 | length 45.2
  Bottom Layer w0.5: U4.1 63.856,67.388 63.101,66.633 57.271,66.633 50.325,73.579 50.325,76.758 50.325,79.504 64.788,79.504 64.792,79.508 70.201,79.508 *2.17
Net*2_19: *2.19 R8.2 | length 3.3
  Bottom Layer w1: R8.2@76.822,81.008 76.822,77.967 *2.19
NetC1_1: C1.1 C3.2 D1.2 U1.1 | length 48.3
  Bottom Layer w0.75: U1.1 34.249,89.655 C3.2
  Bottom Layer w1.5: C3.2 38.37,91.982 65.062,91.982 66.52,90.524 71.21,90.524 C1.1 74.242,90.524 ; 74.308,90.59 D1.2
NetC5_1: C5.1 U2.1 | length 8
  Bottom Layer w0.5: U2.1 33.671,56.203 36.226,58.758 C5.1
NetC5_2: C5.2 U2.3 | length 8.3
  Bottom Layer w0.5: U2.3 34.381,53.663 37.226,56.508 C5.2
NetC6_1: C6.1 U2.2 | length 7.4
  Bottom Layer w0.5: C6.1 28.808,58.84 28.808,54.933 U2.2
NetC7_1: C7.1 U2.4 | length 6.9
  Bottom Layer w0.5: U2.4 C7.1@37.226,52.393
NetC7_2: C7.2 U2.5 | length 6.3
  Bottom Layer w0.5: U2.5 36.611,51.123
NetC8_1: C8.1 F1.2 J3.1 | length 36.4
  Bottom Layer w1: J3.1 15.476,15.758 18.21,15.758 18.214,15.754 18.896,15.754 20.391,17.249 35.907,17.249 38.265,19.607 38.265,23.533 38.315,23.533 42.476,27.695 C8.1@42.476,29.508
NetC9_2: C9.2 U2.6 | length 9.1
  Bottom Layer w0.5: U2.6 35.246,49.853 37.226,47.873 C9.2
NetC10_1: C10.1 U3.17 | length 3.9
  Bottom Layer w0.3: 20.758,21.927 21.102,21.583 U3.17
  Bottom Layer w0.5: C10.1 20.758,21.927
NetC13_2: C13.2 U4.13 Y1.1 | length 10.4
  Bottom Layer w1: C13.2 57.285,33.225 60.193,33.225 Y1.1 60.226,34.758 62.376,36.908 U4.13
NetC14_2: C14.2 U4.12 Y1.2 | length 5.9
  Bottom Layer w1: 59.22,39.064 Y1.2 60.33,38.162 62.82,38.162 U4.12
NetC18_1: C18.1 C21.2 pad.66 pad.67 Q?.1 S1.6 | length 58.5
  Top Layer w1: pad.66 pad.67@19.596,42.756
  Bottom Layer w0.75: pad.67 21.093,42.747 C21.2 22.854,44.508 C18.1@24.978,44.508 ; Q?.1 C18.1
  Bottom Layer w1: S1.6 5.665,74.233 3.504,74.233 3.504,68.708 5.135,67.076 5.135,43.527 13.344,43.527 pad.66
NetC20_1: C20.1 U4.32 | length 2.6
  Bottom Layer w0.5: U4.32@79.346,47.008 U4.32
  Bottom Layer w1: U4.32@79.346,47.008 C20.1
NetC21_1: C21.1 Q?.2 R11.2 | length 17.8
  Bottom Layer w0.75: C21.1 21.872,39.122 22.735,38.259 25.084,38.259 26.268,39.442 Q?.2 26.409,40.681 26.409,42.925 32.645,42.925 R11.2
NetD1_1: D1.1 J1.1 | length 4.2
  Bottom Layer w1.5: D1.1@76.672,86.727 J1.1@80.853,86.727
NetD2_1: D2.1 R1.1 | length 18.7
  Bottom Layer w0.5: R1.1@2.99,22.677 2.99,25.673 4.922,25.673 8.152,28.903 13.213,28.903 14.388,27.728 D2.1
NetD2_2: D2.2 U3.22 | length 6.1
  Bottom Layer w0.3: D2.2@16.928,24.833 16.932,24.829 21.051,24.829 21.059,24.837 21.601,24.837 21.609,24.829 23.022,24.829 U3.22
NetD3_1: D3.1 R2.1 | length 22.1
  Bottom Layer w0.5: R2.1@2.99,19.916 0.976,21.93 0.976,26.427 4.61,26.427 7.84,29.657 14.367,29.657 D3.1
NetD3_2: D3.2 U3.23 | length 9.5
  Bottom Layer w0.3: 20.024,25.483 U3.23
  Bottom Layer w0.5: D3.2 18.679,29.636 18.679,26.828 20.024,25.483
NetD4_1: D4.1 R7.1 | length 13.6
  Bottom Layer w0.5: R7.1 2.976,9.393 6.791,5.578 11.657,5.578 12.137,5.097 D4.1
NetD5_1: D5.1 R6.1 | length 13.1
  Bottom Layer w0.5: R6.1 1.733,14.005 1.73,14.008 1.73,9.484 6.705,4.51 D5.1@6.705,4.258
NetD6_1: D6.1 R5.1 | length 14.9
  Bottom Layer w0.5: D6.1@1.288,4.258 0.976,4.571 0.976,17.008 R5.1@2.973,17.008
NetJ2_2: J2.2 U2.14 | length 20.4
  Bottom Layer w0.5: J2.2 9.589,50.946 9.589,53.126 10.18,53.716 25.573,53.716 U2.14
NetJ2_3: J2.3 U2.13 | length 14.7
  Bottom Layer w0.5: J2.3@10.964,52.393 U2.13
NetJ3_2: J3.2 U3.16 | length 9.9
  Bottom Layer w0.3: J3.2 15.226,19.508 16.555,20.837 21.359,20.837 21.455,20.933 U3.16
NetJ3_3: J3.3 U3.15 | length 12.8
  Bottom Layer w0.3: J3.3 13.318,18.008 14.522,16.804 15.725,16.804 16.43,17.509 16.43,19.244 17.469,20.283 U3.15
"NetKeypad 1_1": "Keypad 1.1" RA1.2 U4.22 | length 34.7
  Bottom Layer w0.5: 67.905,5.338 67.905,5.937 70.472,8.504 70.656,8.504 75.697,13.545 85.013,13.545 85.334,13.866 85.334,21.367 85.192,21.508 RA1.2@83.726,21.508 ; U4.22 RA1.2@83.566,21.668
"NetKeypad 1_2": "Keypad 1.2" RA1.3 U4.23 | length 37.2
  Bottom Layer w0.5: 70.445,5.338 70.445,7.161 76.076,12.791 85.326,12.791 86.088,13.554 86.088,23.896 85.856,24.128 ; U4.23 85.776,24.208
"NetKeypad 1_3": "Keypad 1.3" RA1.4 U4.24 | length 39.9
  Bottom Layer w0.5: 72.985,5.338 72.985,8.517 76.476,12.008 85.609,12.008 86.842,13.241 86.842,26.642 86.816,26.668 RA1.4 ; U4.24 83.716,26.748 RA1.4@83.726,26.758
"NetKeypad 1_4": "Keypad 1.4" RA1.5 U4.25 | length 42.6
  Bottom Layer w0.5: 75.525,5.338 75.525,9.991 76.788,11.254 85.921,11.254 87.596,12.929 87.596,29.258 84.226,29.258 84.026,29.458 83.176,29.458 82.976,29.258 79.716,29.258 U4.25@79.516,29.458
"NetKeypad 1_5": "Keypad 1.5" "Keypad 2.8" pad.3 pad.6 U4.20 | length 73.8
  Top Layer w0.5: pad.3 pad.6
  Bottom Layer w0.5: pad.3 47.185,7.758 47.185,5.338 47.185,3.008 57.974,3.008 57.982,3 65.34,3 65.348,3.008 78.065,3.008 78.065,5.338 ; pad.6 44.73,15.504 44.73,20.85 45.638,21.758 46.79,21.758 50.662,21.758 62.476,21.758 62.476,20.758 U4.20 U4.20@63.856,19.128
"NetKeypad 1_6": "Keypad 1.6" "Keypad 2.7" pad.2 pad.7 U4.19 | length 79.4
  Top Layer w0.5: pad.2 pad.7
  Bottom Layer w0.5: pad.2 44.645,7.758 44.645,5.338 44.645,2.254 57.662,2.254 57.67,2.246 65.653,2.246 65.661,2.254 78.48,2.254 78.48,2.258 80.605,2.258 80.605,5.338 ; pad.7 43.976,13.758 43.976,21.163 45.326,22.512 47.102,22.512 50.35,22.512 62.788,22.512 62.792,22.508 63.266,22.508 U4.19
"NetKeypad 1_7": "Keypad 1.7" "Keypad 2.6" pad.4 pad.8 U4.18 | length 88
  Top Layer w0.5: pad.4 pad.8
  Bottom Layer w0.5: pad.4 42.105,7.758 42.105,5.338 42.105,1.5 57.349,1.5 57.357,1.492 65.965,1.492 65.973,1.5 81.359,1.5 81.359,1.508 83.145,1.508 83.145,5.338 ; pad.8@42.226,13.512 pad.8 43.222,14.004 43.222,21.475 45.013,23.266 47.414,23.266 ; 47.414,23.266 50.038,23.266 ; 50.038,23.266 63.101,23.266 63.105,23.262 63.16,23.262 U4.18 U4.18@64.052,24.262
"NetKeypad 1_8": "Keypad 1.8" "Keypad 2.5" pad.5 pad.9 U4.17 | length 98
  Top Layer w0.5: pad.5 pad.9
  Bottom Layer w0.5: pad.5 39.565,7.758 39.565,5.338 39.565,0.746 57.037,0.746 57.045,0.738 66.277,0.738 66.285,0.746 83.899,0.746 83.899,0.758 85.685,0.758 85.685,5.338 ; pad.9@39.976,13.008 pad.9 42.468,15.75 42.468,21.787 44.701,24.02 47.726,24.02 ; 47.727,24.02 49.726,24.02 ; 49.726,24.02 62.472,24.02 62.472,25.114 U4.17 U4.17@64.106,26.388
"NetKeypad 2_1": "Keypad 2.1" RA1.9 U4.29 | length 82.4
  Bottom Layer w0.5: 29.405,5.338 29.405,7.129 31.6,7.129 35.991,11.52 69.164,11.52 70.723,13.079 70.723,32.655 72.158,34.09 72.193,34.09 73.643,35.54 73.643,37.925 74.024,38.306 74.785,39.067 75.166,39.448 U4.29 79.516,39.618 RA1.9@83.681,39.618
"NetKeypad 2_2": "Keypad 2.2" RA1.8 U4.28 | length 77.8
  Bottom Layer w0.5: 31.945,5.338 31.945,6.408 36.303,10.766 69.476,10.766 71.477,12.767 71.477,32.343 72.47,33.336 72.505,33.336 74.451,35.282 74.451,36.574 74.785,36.908 U4.28 U4.28@79.516,37.078 ; U4.28@79.406,36.828 RA1.8
"NetKeypad 2_3": "Keypad 2.3" RA1.7 U4.27 | length 74.4
  Bottom Layer w0.5: 34.485,5.338 34.485,7.882 36.616,10.012 69.976,10.012 72.231,12.267 72.231,32.03 72.783,32.582 72.818,32.582 74.604,34.368 U4.27 U4.27@79.516,34.538 ; U4.27@79.506,34.288 RA1.7
"NetKeypad 2_4": "Keypad 2.4" RA1.6 U4.26 | length 70.1
  Bottom Layer w0.5: 37.025,5.338 37.025,7.807 38.476,9.258 70.343,9.258 73.478,12.393 73.478,30.994 74.312,31.828 U4.26 ; U4.26@79.236,31.748 RA1.6
NetR9_1: R9.1 U4.21 | length 6.7
  Bottom Layer w0.75: R9.1@75.906,15.508 78.726,15.508 79.346,16.128 U4.21
NetR10_2: pad.64 pad.65 R10.2 R11.1 U3.14 | length 23
  Top Layer w0.75: pad.64 pad.65@32.482,34.423
  Bottom Layer w0.3: U3.14 31.602,20.283
  Bottom Layer w0.5: 31.602,20.283 32.482,21.163 pad.64
  Bottom Layer w1: R10.2 32.619,36.574 ; pad.65@32.44,34.591 R11.1@32.44,38.814
RST: C15.1 D7.A P2.5 pad.16 pad.22 R3.2 U4.9 | length 75.4
  Top Layer w1: pad.22 pad.16
  Bottom Layer w1: R3.2 49.976,44.758 49.976,51.008 C15.1 ; D7.A 60.066,51.108 U4.9 64.296,47.258 66.976,47.258 70.226,44.008 70.226,36.771 67.461,34.006 67.461,16.008 61.226,16.008 pad.16 ; pad.22 58.386,7.758 P2.5
SCK: P1.1@24.008,6.105 P2.3 pad.15 pad.21 pad.27 pad.30 U4.8 | length 109.7
  Top Layer w0.75: pad.27 pad.30 ; pad.21 pad.15
  Bottom Layer w0.75: P1.1@24.008,6.105 26.613,6.105 29.265,8.757 31.984,8.757 41.585,18.357 41.585,22.147 44.337,24.899 48.091,24.899 49.361,24.899 51.226,24.899 pad.30 50.726,28.258 48.23,30.754 48.226,30.758 48.226,53.258 60.976,53.258 64.106,50.128 U4.8 ; pad.27 51.226,19.258 55.726,14.758 pad.15 ; pad.21 55.806,7.678 P2.3
USB-VCC-IN: C11.1 C12.1 F1.1 pad.62 pad.63 Q?.3 R10.1 U3.4 U3.20 | length 65.7
  Top Layer w1: pad.62 pad.63@34.594,34.423
  Bottom Layer w0.3: U3.20 24.726,23.533 25.774,22.486 25.774,18.786 ; U3.4 31.569,26.783 ; C11.1@34.479,26.783 C11.1 ; C11.1@34.528,26.783 pad.62@34.528,30.235
  Bottom Layer w0.5: 31.569,26.783 C11.1@34.479,26.783
  Bottom Layer w0.75: F1.1 18.676,17.131 19.476,17.931 19.476,18.512
  Bottom Layer w1: 19.476,18.512 32.974,18.512 34.553,20.091 C12.1 C11.1@34.553,26.668 ; 28.385,40.54 37.294,40.54 37.621,40.213 R10.1 37.621,35.05 36.999,34.427 pad.63 ; C11.1 pad.62 pad.62@34.597,30.739
pads on no net: J2.1 J2.4 J2.6 J2.7 J2.8 J2.9 S1.1 U1.0 U2.7 U2.8 U2.9 U2.10 U3.2 U3.3 U3.6 U3.8 U3.9 U3.10 U3.11 U3.12 U3.13 U3.19 U3.24 U3.27 U3.28

## Polygon pours and split planes (outlines as drawn)
GND on Bottom Layer "Shield" (solid, remove dead copper, pour order 12): -0.25,94.75 -0.252,94.748 -0.252,61.999 -0.249,61.999 0.251,61.5 0.249,61.498 0.249,42.998 0.244,42.998 -0.252,42.503 -0.252,0.006 -0.005,0.006 -0.001,0.001 0.001,0.004 96.001,0.004 96.001,94.749 96.002,94.75 -0.25,94.75

## Text inside footprints (layer, text, board x,y; h text height)
*2: Top Overlay "LCD 128x64" at 69.726,12.758 h1.52
C1: Top Overlay "+" at 74.885,91.548 h1.52 r270
C2: Top Overlay "+" at 12.528,79.178 h1.52 r90
C5: Top Overlay "+" at 38.369,61.044 h1.52 r270
C6: Top Overlay "+" at 32.512,59.115 h1.52 r180
C7: Top Overlay "+" at 38.369,54.794 h1.52 r270
C8: Top Overlay "+" at 44.762,28.615 h1.52 r180
C9: Top Overlay "+" at 36.083,42.222 h1.52 r90
C11: Top Overlay "+" at 32.308,27.811 h1.52
C15: Top Overlay "+" at 53.119,53.294 h1.52 r270
D2: Top Overlay "-" at 16.651,26.268 h1.52
D3: Top Overlay "-" at 17.055,30.271 h1.52
D4: Top Overlay "-" at 14.804,4.706 h1.52
D5: Top Overlay "-" at 9.372,4.764 h1.52
D6: Top Overlay "-" at 3.955,4.706 h1.52
J2: Top Overlay "6" at 4.993,47.712 h1.5 r90; Top Overlay "9" at 4.993,56.022 h1.5 r90; Top Overlay "5" at 14.393,57.407 h1.5 r90; Top Overlay "1" at 14.393,46.577 h1.5 r90
P1: Top Overlay "1" at 26.04,6.613 h1.27 r180; Top Overlay "2" at 26.548,4.073 h1.27 r180; Top Overlay "5" at 17.404,6.613 h1.27 r180; Top Overlay "6" at 17.404,4.073 h1.27 r180
P1: Top Overlay "6" at 3.65,26.225 h1.27 r270; Top Overlay "5" at 1.11,26.225 h1.27 r270
Q?: Top Overlay "1" at 24.368,37.88 h1.5 r270; Top Overlay "3" at 26.778,38.11 h1.5 r270
Y1: Top Overlay "XTAL" at 62.766,33.893 h1 r90